# EAGLE board apu_pcb (EAGLE 6.5.0)
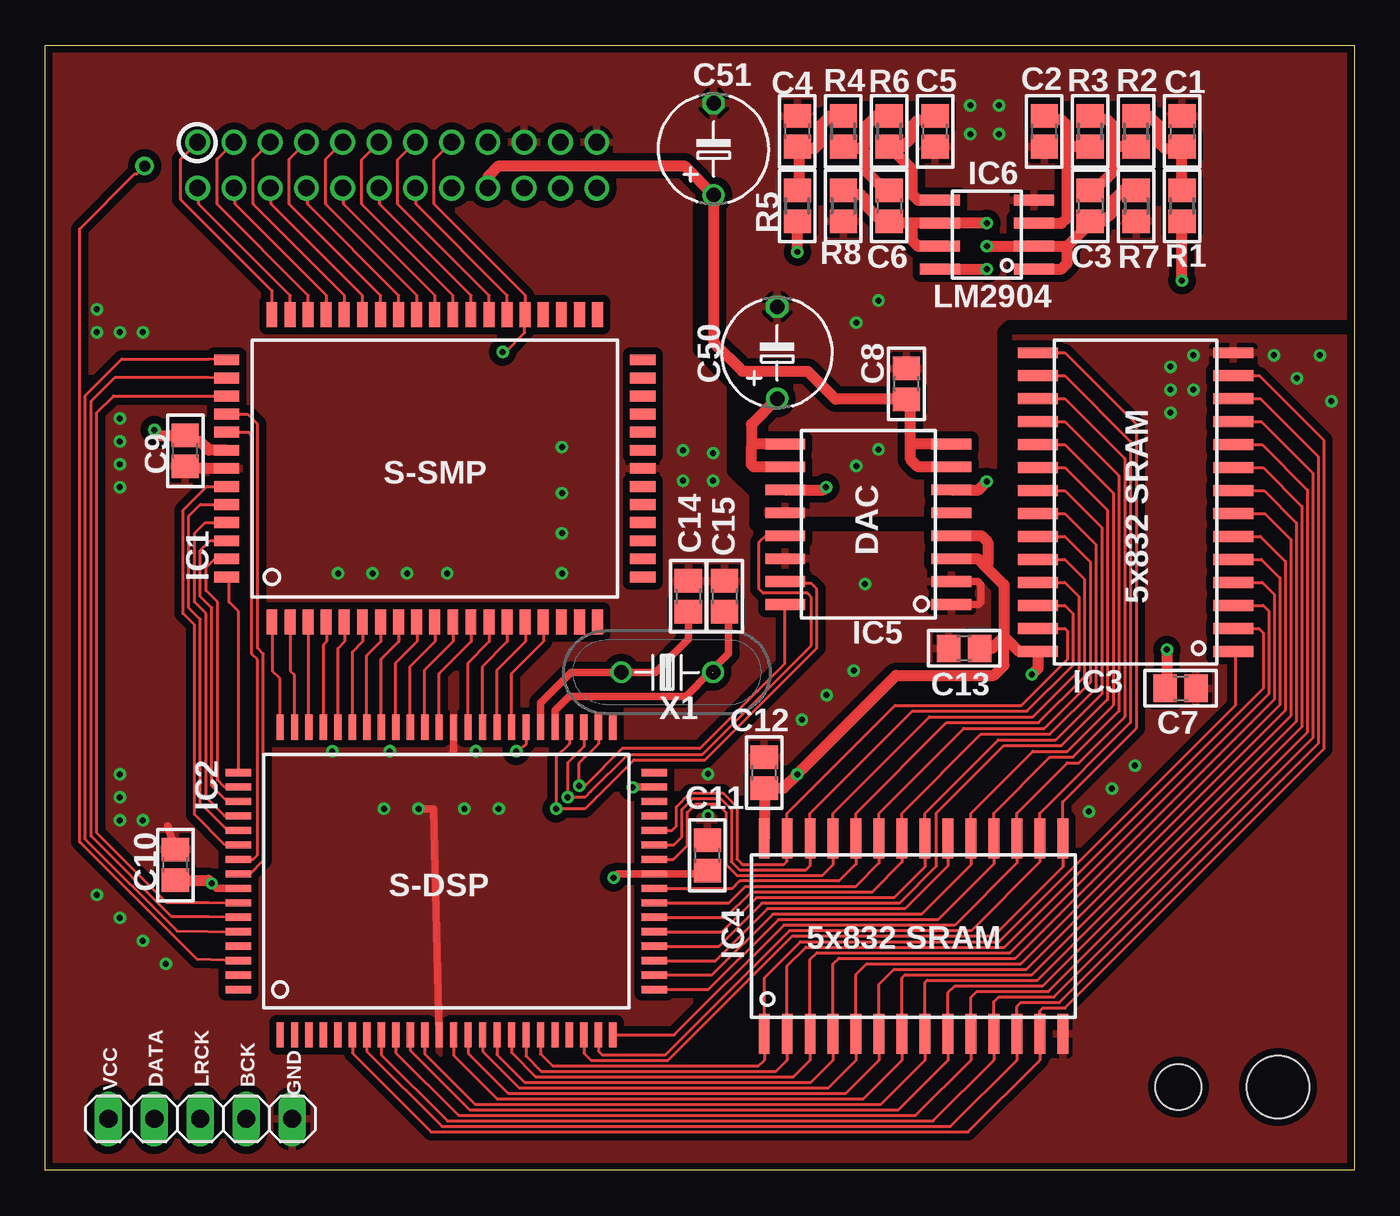
[diagram p0: board, top side]
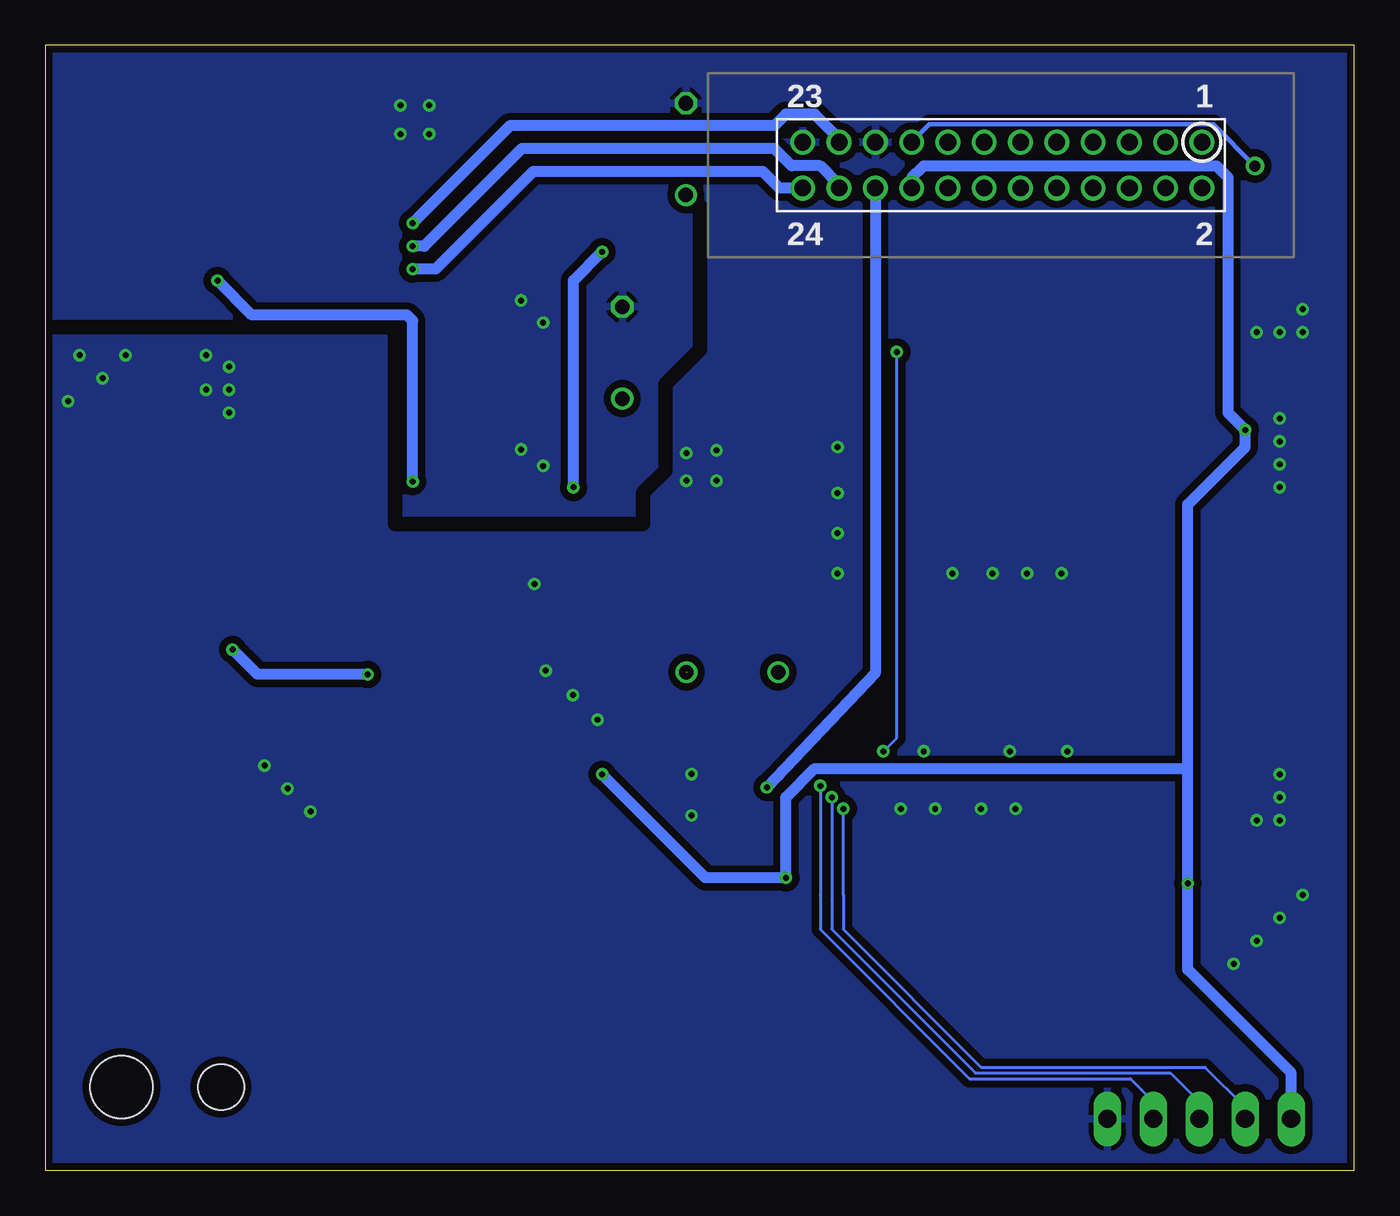
[diagram p1: board, bottom side, seen from below]

Size 72.39 x 62.23 mm. Coordinates in mm from the lower left corner, seen from the top.
Outline: 0,0 0,62.23 72.39,62.23 72.39,0 0,0
Copper layers (1*16): Top 0.0356mm / dielectric 1.5011mm / Bottom 0.0356mm
Design rules "oshpark-2layer": minimum track width 6mil, minimum drill 13mil, track to track 6mil, track to pad 6mil, pad to pad 6mil, via to via 6mil, smd to smd 6mil, copper to edge 15mil, drill to drill 6mil, minimum pad ring 7mil, minimum via ring 7mil, stop-mask expansion 4mil, vias tented up to drill 0mil, thermal gap 10mil
Net classes: 1 Power: width 0.406 mm; 2 Audio: width 0.406 mm
Holes 3.45 mm at 68.17,4.62
Holes 2.54 mm at 62.67,4.62
tRestrict: 10 lines
bRestrict: 9 lines

## Footprints (pad centres in the part's own frame; a part is rotated, then mirrored left to right if it is on the bottom)
C0805 = smd 1.3 x 1.5: 1 -0.85,0; 2 0.85,0
TT5D6 = drill 0.813: + -2.54,0 | drill 0.813 octagon: - 2.54,0
APU = drill 0.914: P$1 0,0; P$2 0,-2.54; P$3 -2.007,0; P$4 -2.007,-2.54; P$5 -4.013,0; P$6 -4.013,-2.54; P$7 -6.02,0; P$8 -6.02,-2.54; P$9 -8.026,0; P$10 -8.026,-2.54; P$11 -10.033,0; P$12 -10.033,-2.54; P$13 -12.04,0; P$14 -12.04,-2.54; P$15 -14.046,0; P$16 -14.046,-2.54; P$17 -16.053,0; P$18 -16.053,-2.54; P$19 -18.059,0; P$20 -18.059,-2.54; P$21 -20.066,0; P$22 -20.066,-2.54; P$23 -22.073,0; P$24 -22.073,-2.54
QFP64_SOT319 = smd 0.6 x 1.4: 1 -9,-8.5; 2 -8,-8.5; 3 -7,-8.5; 4 -6,-8.5; 5 -5,-8.5; 6 -4,-8.5; 7 -3,-8.5; 8 -2,-8.5; 9 -1,-8.5; 10 0,-8.5; 11 1,-8.5; 12 2,-8.5; 13 3,-8.5; 14 4,-8.5; 15 5,-8.5; 16 6,-8.5; 17 7,-8.5; 18 8,-8.5; 19 9,-8.5; 33 9,8.5; 34 8,8.5; 35 7,8.5; 36 6,8.5; 37 5,8.5; 38 4,8.5; 39 3,8.5; 40 2,8.5; 41 1,8.5; 42 0,8.5; 43 -1,8.5; 44 -2,8.5; 45 -3,8.5; 46 -4,8.5; 47 -5,8.5; 48 -6,8.5; 49 -7,8.5; 50 -8,8.5; 51 -9,8.5 | smd 1.4 x 0.6: 20 11.5,-6; 21 11.5,-5; 22 11.5,-4; 23 11.5,-3; 24 11.5,-2; 25 11.5,-1; 26 11.5,0; 27 11.5,1; 28 11.5,2; 29 11.5,3; 30 11.5,4; 31 11.5,5; 32 11.5,6; 52 -11.5,6; 53 -11.5,5; 54 -11.5,4; 55 -11.5,3; 56 -11.5,2; 57 -11.5,1; 58 -11.5,0; 59 -11.5,-1; 60 -11.5,-2; 61 -11.5,-3; 62 -11.5,-4; 63 -11.5,-5; 64 -11.5,-6
QFP80_SOT318 = smd 0.4 x 1.4: 1 -9.2,-8.5; 2 -8.4,-8.5; 3 -7.6,-8.5; 4 -6.8,-8.5; 5 -6,-8.5; 6 -5.2,-8.5; 7 -4.4,-8.5; 8 -3.6,-8.5; 9 -2.8,-8.5; 10 -2,-8.5; 11 -1.2,-8.5; 12 -0.4,-8.5; 13 0.4,-8.5; 14 1.2,-8.5; 15 2,-8.5; 16 2.8,-8.5; 17 3.6,-8.5; 18 4.4,-8.5; 19 5.2,-8.5; 20 6,-8.5; 21 6.8,-8.5; 22 7.6,-8.5; 23 8.4,-8.5; 24 9.2,-8.5; 41 9.2,8.5; 42 8.4,8.5; 43 7.6,8.5; 44 6.8,8.5; 45 6,8.5; 46 5.2,8.5; 47 4.4,8.5; 48 3.6,8.5; 49 2.8,8.5; 50 2,8.5; 51 1.2,8.5; 52 0.4,8.5; 53 -0.4,8.5; 54 -1.2,8.5; 55 -2,8.5; 56 -2.8,8.5; 57 -3.6,8.5; 58 -4.4,8.5; 59 -5.2,8.5; 60 -6,8.5; 61 -6.8,8.5; 62 -7.6,8.5; 63 -8.4,8.5; 64 -9.2,8.5 | smd 1.4 x 0.4: 25 11.5,-6; 26 11.5,-5.2; 27 11.5,-4.4; 28 11.5,-3.6; 29 11.5,-2.8; 30 11.5,-2; 31 11.5,-1.2; 32 11.5,-0.4; 33 11.5,0.4; 34 11.5,1.2; 35 11.5,2; 36 11.5,2.8; 37 11.5,3.6; 38 11.5,4.4; 39 11.5,5.2; 40 11.5,6; 65 -11.5,6; 66 -11.5,5.2; 67 -11.5,4.4; 68 -11.5,3.6; 69 -11.5,2.8; 70 -11.5,2; 71 -11.5,1.2; 72 -11.5,0.4; 73 -11.5,-0.4; 74 -11.5,-1.2; 75 -11.5,-2; 76 -11.5,-2.8; 77 -11.5,-3.6; 78 -11.5,-4.4; 79 -11.5,-5.2; 80 -11.5,-6
SO28X = smd 0.6 x 2.2: 1 -8.255,-5.4; 2 -6.985,-5.4; 3 -5.715,-5.4; 4 -4.445,-5.4; 5 -3.175,-5.4; 6 -1.905,-5.4; 7 -0.635,-5.4; 8 0.635,-5.4; 9 1.905,-5.4; 10 3.175,-5.4; 11 4.445,-5.4; 12 5.715,-5.4; 13 6.985,-5.4; 14 8.255,-5.4; 15 8.255,5.4; 16 6.985,5.4; 17 5.715,5.4; 18 4.445,5.4; 19 3.175,5.4; 20 1.905,5.4; 21 0.635,5.4; 22 -0.635,5.4; 23 -1.905,5.4; 24 -3.175,5.4; 25 -4.445,5.4; 26 -5.715,5.4; 27 -6.985,5.4; 28 -8.255,5.4
SO16W = smd 0.6 x 2.2: 1 -4.445,-4.6; 2 -3.175,-4.6; 3 -1.905,-4.6; 4 -0.635,-4.6; 5 0.635,-4.6; 6 1.905,-4.6; 7 3.175,-4.6; 8 4.445,-4.6; 9 4.445,4.6; 10 3.175,4.6; 11 1.905,4.6; 12 0.635,4.6; 13 -0.635,4.6; 14 -1.905,4.6; 15 -3.175,4.6; 16 -4.445,4.6
SO-08 = smd 0.6 x 2.2: 1 -1.905,-2.6; 2 -0.635,-2.6; 3 0.635,-2.6; 4 1.905,-2.6; 5 1.905,2.6; 6 0.635,2.6; 7 -0.635,2.6; 8 -1.905,2.6
R0805 = smd 1.3 x 1.5: 1 -0.85,0; 2 0.85,0
1X05 = drill 1.016 long: 1 -5.08,0; 2 -2.54,0; 3 0,0; 4 2.54,0; 5 5.08,0
QS = drill 0.8: 1 -2.54,0; 2 2.54,0

## Placement (x,y rotation side)
C1  [C0805]  62.87,57.47 270 top
C2  [C0805]  55.24,57.47 90 top
C3  [C0805]  57.78,53.34 270 top
C4  [C0805]  41.59,57.47 90 top
C5  [C0805]  49.21,57.47 90 top
C6  [C0805]  46.67,53.34 270 top
C7  [C0805]  62.79,26.67 0 top
C8  [C0805]  47.62,43.5 90 top
C9  [C0805]  7.75,39.8 90 top
C10  [C0805]  7.2,16.9 90 top
C11  [C0805]  36.62,17.43 90 top
C12  [C0805]  39.76,21.99 90 top
C13  [C0805]  50.81,28.88 180 top
C14  [C0805]  35.56,31.75 270 top
C15  [C0805]  37.57,31.75 270 top
C50  [TT5D6]  40.48,45.22 90 top
C51  [TT5D6]  36.96,56.48 90 top
E$3  [APU]  8.43,56.87 0 bottom
IC1  S-SMP  [QFP64_SOT319]  21.54,38.83 0 top
IC2  S-DSP  [QFP80_SOT318]  22.19,16.01 0 top
IC3  5x832 SRAM  [SO28X]  60.29,36.97 90 top
IC4  5x832 SRAM  [SO28X]  48.02,12.96 0 top
IC5  DAC  [SO16W]  45.52,35.74 90 top
IC6  LM2904  [SO-08]  52.07,51.75 90 top
R1  [R0805]  62.87,53.34 270 top
R2  [R0805]  60.33,57.47 90 top
R3  [R0805]  57.78,57.47 90 top
R4  [R0805]  44.13,57.47 90 top
R5  [R0805]  41.59,53.34 90 top
R6  [R0805]  46.67,57.47 90 top
R7  [R0805]  60.33,53.34 270 top
R8  [R0805]  44.13,53.34 270 top
SV1  [1X05]  8.57,2.86 0 top
X1  [QS]  34.39,27.55 180 top

## Library data of the parts
C1-C15 C50 C51 E$3 IC1-IC6 R1-R8 X1 = apu_pcb
SV1 = pinhead

## Nets
!CE0: IC2.28 IC3.20
!CE1: IC2.27 IC4.20
!MUTE [Power]: E$3.P$20 IC2.39
!OE: IC2.30 IC3.22 IC4.22
!P_RD: E$3.P$6 IC1.46
!P_WR: E$3.P$5 IC1.47
!RESET: E$3.P$15 IC1.37 IC2.47
!WE: IC2.36 IC3.27 IC4.27
A0: IC2.9 IC3.10 IC4.10
A1: IC2.10 IC3.9 IC4.9
A2: IC2.11 IC3.8 IC4.8
A3: IC2.13 IC3.7 IC4.7
A4: IC2.14 IC3.6 IC4.6
A5: IC2.15 IC3.5 IC4.5
A6: IC2.16 IC3.4 IC4.4
A7: IC2.17 IC3.3 IC4.3
A8: IC2.34 IC3.25 IC4.25
A9: IC2.32 IC3.24 IC4.24
A10: IC2.29 IC3.21 IC4.21
A11: IC2.31 IC3.23 IC4.23
A12: IC2.18 IC3.2 IC4.2
A13: IC2.35 IC3.26 IC4.26
A14: IC2.19 IC3.1 IC4.1
A.REF [Power]: C50.+ IC5.9 IC5.10
AVCC [Audio]: E$3.P$24 IC6.8
BCK: IC2.42 IC5.16 SV1.4
D0: IC2.8 IC3.11 IC4.11
D1: IC2.7 IC3.12 IC4.12
D2: IC2.6 IC3.13 IC4.13
D3: IC2.22 IC3.15 IC4.15
D4: IC2.23 IC3.16 IC4.16
D5: IC2.24 IC3.17 IC4.17
D6: IC2.25 IC3.18 IC4.18
D7: IC2.26 IC3.19 IC4.19
DSP_A0: IC1.5 IC2.60
DSP_A1: IC1.4 IC2.61
DSP_A2: IC1.3 IC2.62
DSP_A3: IC1.2 IC2.63
DSP_A4: IC1.1 IC2.64
DSP_A5: IC1.64 IC2.65
DSP_A6: IC1.63 IC2.66
DSP_A7: IC1.62 IC2.67
DSP_A8: IC1.61 IC2.68
DSP_A9: IC1.60 IC2.69
DSP_A10: IC1.59 IC2.70
DSP_A11: IC1.56 IC2.71
DSP_A12: IC1.55 IC2.72
DSP_A13: IC1.54 IC2.74
DSP_A14: IC1.53 IC2.75
DSP_A15: IC1.52 IC2.76
DSP_CPUK: IC1.16 IC2.48
DSP_D0: IC1.13 IC2.51
DSP_D1: IC1.12 IC2.53
DSP_D2: IC1.11 IC2.54
DSP_D3: IC1.10 IC2.55
DSP_D4: IC1.9 IC2.56
DSP_D5: IC1.8 IC2.57
DSP_D6: IC1.7 IC2.58
DSP_D7: IC1.6 IC2.59
DSP_PD2: IC1.15 IC2.49
DSP_PD3: IC1.14 IC2.50
GND [Power]: C1.1 C2.1 C4.2 C5.1 C7.2 C8.2 C9.1 C10.2 C11.2 C12.2 C13.2 C14.1 C15.1 C50.- C51.- E$3.P$19 E$3.P$23 IC1.26 IC1.58 IC2.12 IC2.52 IC3.14 IC4.14 IC5.1 IC5.2 IC5.12 IC5.14 IC6.4 R7.2 R8.2 SV1.5
L1 [Audio]: C4.1 R4.2 R5.2
L2 [Audio]: C6.1 R4.1 R6.2
L3 [Audio]: C5.2 IC6.5 R6.1
L.OUT [Audio]: IC5.11 R5.1
LEFT [Audio]: C6.2 E$3.P$21 IC6.6 IC6.7 R8.1
LRCK: IC2.43 IC5.13 SV1.3
PA0: E$3.P$3 IC1.49
PA1: E$3.P$4 IC1.48
PA6: E$3.P$2 IC1.50
PA7: E$3.P$1 IC1.51
PD0: E$3.P$7 IC1.45
PD1: E$3.P$8 IC1.44
PD2: E$3.P$9 IC1.43
PD3: E$3.P$10 IC1.42
PD4: E$3.P$11 IC1.41
PD5: E$3.P$12 IC1.40
PD6: E$3.P$13 IC1.39
PD7: E$3.P$14 IC1.38
R1 [Audio]: C1.2 R1.1 R2.2
R2 [Audio]: C3.1 R2.1 R3.2
R3 [Audio]: C2.2 IC6.3 R3.1
R.OUT [Audio]: IC5.6 R1.2
RIGHT [Audio]: C3.2 E$3.P$22 IC6.1 IC6.2 R7.1
SMPCLK: E$3.P$17 IC2.78
SO: IC2.44 IC5.15 SV1.2
VCC [Power]: C7.1 C8.1 C9.2 C10.1 C11.1 C12.1 C13.1 C51.+ E$3.P$18 IC1.57 IC2.33 IC2.73 IC3.28 IC4.28 IC5.3 IC5.4 IC5.7 IC5.8 SV1.1
XTAL1: C15.2 IC2.45 X1.1
XTAL2: C14.2 IC2.46 X1.2

## Tracks (layer width: path | path; a pad name or v marks a point on that pad's centre or on a via)
!CE0
  Top 0.152: IC2.28 37.25,12.41 39.62,14.78 47.24,14.78 49.3,16.83 49.3,19.77 53.02,23.5 56.2,23.5 58.74,26.04 58.74,36.51 56.38,38.87 IC3.20
!CE1
  Top 0.152: IC2.27 37.06,11.61 39.93,14.48 47.55,14.48 49.92,16.85 IC4.20
!MUTE  (via drill 0.33 pad 0.69)
  Top 0.406: IC2.39 32.51,21.21 v32.49,21.18
  Bottom 0.61: E$3.P$20 26.48,27.5 v32.49,21.18
!OE
  Top 0.152: IC2.30 37.63,14.01 39.01,15.39 45.72,15.39 47.38,17.05 IC4.22 47.38,19.76 51.75,24.13 55.56,24.13 58.1,26.67 58.1,34.61 56.38,36.33 IC3.22
!P_RD
  Top 0.152: IC1.46 17.55,48.39 12.5,53.44 12.5,54.27 E$3.P$6
!P_WR
  Top 0.152: IC1.47 16.55,48.39 11.5,53.44 11.5,55.93 E$3.P$5
!RESET  (via drill 0.33 pad 0.69)
  Top 0.152: E$3.P$15 21.5,55.89 21.5,53.44 26.55,48.39 IC1.37 26.52,47.29 26.52,46.33 25.45,45.26 v25.3,45.26 | IC2.47 26.59,23.56 v26.05,23.18
  Bottom 0.152: v26.05,23.18 25.3,23.93 v25.3,45.26
!WE
  Top 0.152: IC3.27 56.38,29.98 56.52,29.84 56.52,28.26 53.98,25.72 46.99,25.72 41.03,19.76 IC4.27 41.03,17.1 40.84,16.92 38.56,16.92 38.25,17.22 38.25,20.12 37.49,20.88 35.66,20.88 34.9,20.12 34.9,19.05 34.66,18.81 IC2.36
A0
  Top 0.152: IC3.10 67.3,40.14 69.8,37.64 69.8,24.23 55.47,9.91 51.51,9.91 51.19,9.59 IC4.10 51.19,6.11 48.13,3.05 22.86,3.05 19.39,6.52 IC2.9
A1
  Top 0.152: IC3.9 67.35,38.87 69.49,36.73 69.49,24.54 55.17,10.21 50.29,10.21 49.92,9.84 IC4.9 49.92,6.11 47.17,3.35 23.47,3.35 20.19,6.63 IC2.10
A2
  Top 0.152: IC3.8 67.4,37.6 69.19,35.81 69.19,24.84 54.86,10.52 48.77,10.52 48.65,10.4 IC4.8 48.65,6.11 46.2,3.66 23.77,3.66 20.99,6.45 IC2.11
A3
  Top 0.152: IC3.7 67.45,36.33 68.89,34.9 68.89,25.15 54.56,10.82 47.55,10.82 47.38,10.65 IC4.7 47.38,6.11 45.24,3.96 24.99,3.96 22.59,6.37 IC2.13
A4
  Top 0.152: IC3.6 67.2,35.06 68.58,33.68 68.58,25.45 54.25,11.12 46.94,11.12 46.11,10.3 IC4.6 46.11,6.11 44.27,4.27 25.6,4.27 23.39,6.48 IC2.14
A5
  Top 0.152: IC3.5 67.25,33.79 68.28,32.77 68.28,25.76 53.95,11.43 45.41,11.43 44.84,10.86 IC4.5 44.84,6.11 43.31,4.57 26.21,4.57 24.19,6.6 IC2.15
A6
  Top 0.152: IC3.4 67.3,32.52 67.97,31.85 67.97,26.06 53.65,11.73 43.89,11.73 43.57,11.41 IC4.4 43.57,6.11 42.34,4.88 26.52,4.88 24.99,6.41 IC2.16
A7
  Top 0.152: IC3.3 67.35,31.25 67.67,30.94 67.67,26.36 53.34,12.04 42.67,12.04 42.3,11.67 IC4.3 42.3,6.11 41.38,5.18 27.13,5.18 25.79,6.52 IC2.17
A8
  Top 0.152: IC3.25 56.38,32.52 57.15,31.75 57.15,27.62 54.61,25.08 48.9,25.08 43.57,19.76 IC4.25 43.57,16.9 42.98,16.31 38.25,16.31 37.64,16.92 37.64,19.81 37.19,20.27 35.97,20.27 35.51,19.81 35.51,17.98 34.73,17.21 IC2.34
A9
  Top 0.152: IC2.32 38.01,15.61 38.41,16 43.89,16 44.84,16.95 IC4.24 44.84,19.76 49.85,24.77 54.93,24.77 57.47,27.3 57.47,32.7 56.38,33.79 IC3.24
A10
  Top 0.152: IC2.29 37.44,13.21 39.32,15.09 46.94,15.09 48.65,16.8 IC4.21 48.65,19.76 52.7,23.81 55.88,23.81 58.42,26.35 58.42,35.56 56.38,37.6 IC3.21
A11
  Top 0.152: IC2.31 37.82,14.81 38.71,15.7 44.81,15.7 46.11,17 IC4.23 46.11,19.76 50.8,24.45 55.24,24.45 57.78,26.99 57.78,33.66 56.38,35.06 IC3.23
A12
  Top 0.152: IC3.2 67.1,29.98 67.36,29.72 67.36,26.67 53.03,12.34 42.06,12.34 41.03,11.31 IC4.2 41.03,6.11 40.41,5.49 27.43,5.49 26.59,6.33 IC2.18
A13
  Top 0.152: IC3.26 56.38,31.25 56.83,30.8 56.83,27.94 54.29,25.4 47.94,25.4 42.3,19.76 IC4.26 42.3,16.85 42.06,16.61 38.41,16.61 37.95,17.07 37.95,19.96 37.34,20.57 35.81,20.57 35.2,19.96 35.2,18.44 34.77,18.01 IC2.35
A14
  Top 0.152: IC3.1 65.84,28.57 65.84,25.76 52.73,12.65 41.76,12.65 39.76,10.65 IC4.1 39.76,6.11 39.45,5.79 28.04,5.79 27.39,6.45 IC2.19
A.REF
  Top 0.61: IC5.9 39.23,40.18 39.05,40.01 | IC5.10 39.19,38.91 39.05,39.05 39.05,40.01 | C50.+ 39.05,41.26 39.05,40.01
AVCC  (via drill 0.33 pad 0.69)
  Top 0.61: IC6.8 v52.07,49.85
  Bottom 0.61: E$3.P$24 31.78,54.33 32.7,55.24 45.4,55.24 50.8,49.85 v52.07,49.85
BCK  (via drill 0.33)
  Top 0.152: IC5.16 40.87,31.24 40.87,28 36.2,23.34 31.91,23.34 29.84,21.27 v29.53,21.27 29.53,22.54 30.59,23.6 IC2.42
  Bottom 0.152: SV1.4 11.11,3.81 12.38,5.08 21.27,5.08 29.53,13.34 29.53,15.24 v29.53,21.27
D0
  Top 0.152: IC3.11 67.25,41.41 70.1,38.56 70.1,23.93 55.78,9.6 52.73,9.6 52.46,9.33 IC4.11 52.46,6.11 49.1,2.74 22.25,2.74 18.59,6.41 IC2.8
D1
  Top 0.152: IC3.12 67.2,42.68 70.41,39.47 70.41,23.62 56.08,9.3 53.95,9.3 53.73,9.08 IC4.12 53.73,6.11 50.06,2.44 21.95,2.44 17.79,6.6 IC2.7
D2
  Top 0.152: IC3.13 67.15,43.95 70.71,40.39 70.71,23.32 56.39,8.99 55.17,8.99 55,8.82 IC4.13 55,6.11 51.03,2.13 21.34,2.13 16.99,6.48 IC2.6
D3
  Top 0.152: IC3.15 56.38,45.22 60.33,41.27 60.33,24.45 56.27,20.39 IC4.15 56.27,16.8 52.43,12.95 41.3,12.95 34.44,6.1 30.18,6.1 29.79,6.48 IC2.22
D4
  Top 0.152: IC3.16 56.38,43.95 60.01,40.32 60.01,24.77 55,19.76 IC4.16 55,17.05 51.21,13.26 41.15,13.26 34.29,6.4 30.79,6.4 30.59,6.6 IC2.23
D5
  Top 0.152: IC2.24 34.81,7.51 34.81,7.53 40.84,13.56 50.29,13.56 53.73,17 IC4.17 53.73,19.76 56.52,22.54 57.15,22.54 59.69,25.08 59.69,39.37 56.38,42.68 IC3.17
D6
  Top 0.152: IC2.25 36.68,10.01 40.54,13.87 49.38,13.87 52.46,16.95 IC4.18 52.46,19.76 55.56,22.86 56.83,22.86 59.37,25.4 59.37,38.42 56.38,41.41 IC3.18
D7
  Top 0.152: IC2.26 36.87,10.81 40.23,14.17 48.46,14.17 51.19,16.9 IC4.19 51.19,19.76 54.61,23.18 56.52,23.18 59.05,25.72 59.05,37.47 56.38,40.14 IC3.19
DSP_A0
  Top 0.152: IC1.5 16.55,29.24 16.19,28.88 IC2.60
DSP_A1
  Top 0.152: IC1.4 15.55,29.24 15.39,29.08 IC2.61
DSP_A2
  Top 0.152: IC1.3 14.55,24.54 IC2.62
DSP_A3
  Top 0.152: IC2.63 13.79,27.4 13.55,27.64 IC1.2
DSP_A4
  Top 0.152: IC2.64 12.99,27.2 12.55,27.64 IC1.1
DSP_A5
  Top 0.152: IC2.65 10.69,30.91 10.16,31.43 10.16,32.72 IC1.64
DSP_A6
  Top 0.152: IC2.66 9.91,21.21 9.53,21.59 9.53,31.43 8.89,32.07 8.89,33.34 9.38,33.83 IC1.63
DSP_A7
  Top 0.152: IC2.67 10.07,20.41 9.21,21.27 9.21,31.11 8.57,31.75 8.57,34.29 9.11,34.83 IC1.62
DSP_A8
  Top 0.152: IC2.68 9.92,19.61 8.89,20.64 8.89,30.8 8.26,31.43 8.26,35.24 8.84,35.83 IC1.61
DSP_A9
  Top 0.152: IC2.69 10.09,18.81 8.57,20.32 8.57,30.48 7.94,31.11 7.94,36.2 8.57,36.83 IC1.60
DSP_A10
  Top 0.152: IC2.70 9.93,18.01 8.26,19.68 8.26,30.16 7.62,30.8 7.62,36.51 8.94,37.83 IC1.59
DSP_A11
  Top 0.152: IC2.71 11.49,17.21 11.75,17.46 11.75,28.26 11.43,28.57 11.43,40.64 11.24,40.83 IC1.56
DSP_A12
  Top 0.152: IC2.72 11.33,16.41 12.06,17.14 12.06,28.57 11.75,28.89 11.75,41.27 11.19,41.83 IC1.55
DSP_A13
  Top 0.152: IC2.74 9.06,14.82 6.69,14.82 2.86,18.66 2.86,41.91 3.78,42.83 IC1.54
DSP_A14
  Top 0.152: IC2.75 9.06,14.03 7,14.03 2.54,18.5 2.54,42.55 3.86,43.87 9.03,43.87 IC1.53
DSP_A15
  Top 0.152: IC1.52 9.03,44.88 4.24,44.88 2.22,42.86 2.22,18.32 7.3,13.25 IC2.76
DSP_CPUK
  Top 0.152: IC1.16 27.55,29.24 25.79,27.48 IC2.48
DSP_D0
  Top 0.152: IC1.13 24.55,29.24 23.39,28.08 IC2.51
DSP_D1
  Top 0.152: IC1.12 23.55,29.24 21.79,27.48 IC2.53
DSP_D2
  Top 0.152: IC1.11 22.55,29.24 20.99,27.68 IC2.54
DSP_D3
  Top 0.152: IC1.10 21.55,29.24 20.19,27.88 IC2.55
DSP_D4
  Top 0.152: IC1.9 20.55,29.24 19.39,28.08 IC2.56
DSP_D5
  Top 0.152: IC1.8 19.55,29.24 18.59,28.28 IC2.57
DSP_D6
  Top 0.152: IC1.7 18.55,29.24 17.79,28.48 IC2.58
DSP_D7
  Top 0.152: IC1.6 17.55,29.24 16.99,28.68 IC2.59
DSP_PD2
  Top 0.152: IC1.15 26.55,29.24 24.99,27.68 IC2.49
DSP_PD3
  Top 0.152: IC1.14 25.55,29.24 24.19,27.88 IC2.50
GND  (via drill 0.33 pad 0.69)
  Top 0.406: C10.2 6.78,19.05 | IC2.12 21.47,20 v20.64,20 | IC5.2 51.58,32.56 51.75,32.38 51.75,31.43 51.61,31.29 IC5.1 | IC2.52 22.59,23.22 22.54,23.18
  Top 0.61: IC1.58 7.87,38.83 C9.1
  other vias: 15.88,23.18 19.05,23.18 23.81,23.18 25.08,20 23.18,20 18.73,20 62.23,41.91 69.22,43.81 67.94,45.09 63.5,45.09 62.23,44.45 63.5,43.18 62.23,43.18 70.48,45.09 71.12,42.55 16.19,33.02 18.1,33.02 20,33.02 22.23,33.02 4.13,41.59 4.13,40.32 4.13,39.05 4.13,37.78 4.13,19.37 5.4,19.37 4.13,20.64 4.13,21.91 4.13,46.35 5.4,46.35 2.86,46.35 2.86,47.62 44.86,38.96 46.08,39.88 44.86,46.89 46.08,48.11 36.65,19.63 36.65,21.92 35.27,38.15 36.93,38.15 36.93,39.67 35.27,39.83 41.85,24.93 43.21,26.29 44.72,27.65 45.34,32.44 51.16,57.32 52.74,57.32 52.74,58.9 51.16,58.9 57.72,19.85 58.99,21.12 60.26,22.39 2.86,15.24 4.13,13.97 5.4,12.7 6.67,11.43 28.57,33.02 28.57,35.24 28.57,37.47 28.57,40.01
  pour Bottom (isolate 0.406): 0,0 72.39,0 72.39,62.23 0,62.23
  pour Top (isolate 0.406): 0,0 72.39,0 72.39,62.23 0,62.23
L1
  Top 0.61: R4.2 43.4,58.32 42.86,57.78 42.86,56.83 42.55,56.52 41.7,56.52 | 41.7,56.52 C4.1 | 41.7,56.52 41.7,54.29 R5.2
L2
  Top 0.61: R6.2 45.94,58.32 45.4,57.78 45.4,56.83 45.09,56.52 | 45.09,56.52 44.23,56.52 R4.1 | C6.1 46.46,54.19 45.4,55.24 45.4,56.2 45.09,56.52
L3
  Top 0.61: IC6.5 48.26,53.66 47.94,53.98 47.94,55.35 R6.1 47.41,56.62 47.94,57.15 47.94,57.78 48.26,58.1 49,58.1 C5.2
L.OUT  (via drill 0.33 pad 0.69)
  Top 0.61: IC5.11 43.04,37.64 v43.18,37.78 | v41.59,50.8 R5.1
  Bottom 0.61: v43.18,37.78 43.18,49.21 v41.59,50.8
LEFT  (via drill 0.33 pad 0.69)
  Top 0.61: 47.94,52.39 IC6.6 v52.07,52.39 | 47.94,52.39 46.77,52.39 C6.2 46.25,52.49 45.4,53.34 45.4,53.66 45.09,53.98 44.35,53.98 R8.1 | IC6.7 48.26,51.12 47.94,51.44 47.94,52.39
  Bottom 0.61: E$3.P$21 28.49,57.07 29.84,58.42 31.43,58.42 32.07,57.78 46.67,57.78 v52.07,52.39
LRCK  (via drill 0.33)
  Top 0.152: IC5.13 40.81,35.2 39.93,35.2 39.47,34.75 39.47,32.16 39.7,31.93 42.14,31.93 42.37,31.7 42.37,29.05 36.34,23.01 32.22,23.01 30.16,20.95 29.84,20.64 v28.89,20.64 28.89,22.54 29.79,23.44 IC2.43
  Bottom 0.152: SV1.3 8.57,3.81 10.16,5.4 20.95,5.4 28.89,13.34 28.89,14.92 v28.89,20.64
PA0
  Top 0.152: IC1.49 14.55,48.39 9.5,53.44 9.5,55.93 E$3.P$3
PA1
  Top 0.152: IC1.48 15.55,48.39 10.5,53.44 10.5,54.26 E$3.P$4
PA6
  Top 0.152: IC1.50 13.55,48.39 8.5,53.44 8.5,54.25 E$3.P$2
PA7
  Top 0.152: IC1.51 12.55,48.64 7.5,53.69 7.5,55.94 E$3.P$1
PD0
  Top 0.152: IC1.45 18.55,48.39 13.5,53.44 13.5,55.92 E$3.P$7
PD1
  Top 0.152: IC1.44 19.55,48.39 14.5,53.44 14.5,54.27 E$3.P$8
PD2
  Top 0.152: IC1.43 20.55,48.39 15.5,53.44 15.5,55.91 E$3.P$9
PD3
  Top 0.152: IC1.42 21.55,48.39 16.5,53.44 16.5,54.28 E$3.P$10
PD4
  Top 0.152: IC1.41 22.55,48.39 17.5,53.44 17.5,55.91 E$3.P$11
PD5
  Top 0.152: IC1.40 23.55,48.39 18.5,53.44 18.5,54.28 E$3.P$12
PD6
  Top 0.152: IC1.39 24.55,48.39 19.5,53.44 19.5,55.9 E$3.P$13
PD7
  Top 0.152: IC1.38 25.55,48.39 20.5,53.44 20.5,54.29 E$3.P$14
R1
  Top 0.61: R2.2 61.06,58.32 61.59,57.78 61.59,56.83 61.91,56.52 62.76,56.52 C1.2 R1.1
R2
  Top 0.61: 60.64,56.3 R2.1 59.27,56.62 | 59.27,56.62 59.05,56.83 59.05,57.78 58.74,58.1 58,58.1 R3.2 | C3.1 58,54.19 59.05,55.24 59.05,56.4 59.27,56.62
R3
  Top 0.61: R3.1 56.62,56.62 | C2.2 55.46,58.1 56.2,58.1 56.52,57.78 56.52,56.72 56.62,56.62 | IC6.3 56.2,52.39 56.52,52.7 56.52,56.52 56.62,56.62
R.OUT  (via drill 0.33 pad 0.69)
  Top 0.61: IC5.6 51.61,37.64 v52.07,38.1 | v62.87,49.21 R1.2
  Bottom 0.61: v52.07,38.1 52.07,46.99 52.39,47.31 60.96,47.31 v62.87,49.21
RIGHT  (via drill 0.33 pad 0.69)
  Top 0.61: v52.07,51.12 IC6.2 56.52,51.12 | IC6.1 56.2,49.85 56.52,50.16 56.52,51.12 | R7.1 60.22,54.29 59.69,54.29 59.05,53.66 59.05,53.02 58.52,52.49 C3.2 57.47,52.17 57.47,52.07 56.52,51.12
  Bottom 0.61: E$3.P$22 28.49,54.53 29.53,55.56 31.11,55.56 32.07,56.52 46.04,56.52 51.44,51.12 v52.07,51.12
SMPCLK  (via drill 0.61 pad 1.02)
  Top 0.152: IC2.78 8.41,11.67 1.91,18.17 1.91,52.07 4.96,55.12 5.06,55.12 v5.49,55.55
  Bottom 0.254: v5.49,55.55 7.8,57.86 23.49,57.86 E$3.P$17
SO  (via drill 0.33)
  Top 0.152: IC5.15 41.02,32.46 42.37,32.46 42.67,32.16 42.67,28.89 36.49,22.71 32.55,22.71 30.48,20.64 29.84,20 v28.26,20 28.26,22.86 28.99,23.59 IC2.44
  Bottom 0.152: SV1.2 6.03,3.49 8.26,5.71 20.64,5.71 28.26,13.34 28.26,15.24 v28.26,20 28.26,20.32
VCC  (via drill 0.33 pad 0.69)
  Top 0.406: v31.43,16.19 31.65,16.41 IC2.33 36.45,16.41 C11.1 | IC2.73 9.48,15.61 v9.21,15.88
  Top 0.61: E$3.P$18 24.48,54.96 25.08,55.56 35.35,55.56 C51.+ 36.96,45.79 38.56,44.2 42.16,44.2 43.71,42.65 C8.1 47.85,42.42 47.85,40.23 | IC5.3 51.58,33.83 52,33.41 | 52,33.41 53.02,32.38 53.02,29.53 | 53.02,29.53 52.39,28.89 51.67,28.89 C13.1 | 53.02,29.53 53.84,28.71 IC3.28 54.9,27.77 v54.56,27.43 | 53.02,29.53 53.02,27.94 52.47,27.39 47.05,27.39 41.59,21.93 v41.59,21.91 40.83,21.14 C12.1 IC4.28 | IC1.57 9.07,39.83 8.57,40.32 8.08,40.32 C9.2 6.34,40.65 v6.03,40.96 | v62.03,28.8 62.03,26.76 C7.1 | IC5.7 48.26,38.91 47.85,39.32 47.85,40.23 | IC5.8 47.91,40.18 47.85,40.23 | IC5.4 51.77,35.1 52.12,34.75 52.12,33.53 52,33.41 | C10.1 9.04,16.05 v9.21,15.88
  Bottom 0.61: E$3.P$18 24.48,54.9 23.81,55.56 7.62,55.56 6.99,54.93 6.99,41.91 v6.03,40.96 6.03,40.01 9.21,36.83 9.21,22.23 | v54.56,27.43 60.66,27.43 v62.03,28.8 | v41.59,21.91 35.88,16.19 v31.43,16.19 31.43,20.64 29.84,22.23 9.21,22.23 | 9.21,22.23 v9.21,15.88 9.21,11.11 3.49,5.4 SV1.1
XTAL1  (1 unrouted)
  Top 0.406: IC2.45 28.19,25.44 28.97,26.23 35.43,26.23 36.83,27.62 | C15.2 37.8,30.78 37.8,28.59 36.83,27.62 | 36.9,27.55 36.83,27.62
XTAL2
  Top 0.406: IC2.46 27.39,25.86 29.08,27.55 X1.2 33.75,27.55 35.59,29.39 C14.2 35.5,30.79

## Text on the board
tPlace: VCC | GND | DATA | LRCK | BCK